# Altium PCB ESP32_USBC_V1_I1.PcbDoc (part 3 of 3)
Units mil, origin at the board's own origin, x right, y up, seen from the top; angles counter-clockwise.
Board outline 2700 x 1000 mil, 4 copper layers (L1, L2, L3, L4), stack 61.583 mil thick; 64 components, 73 nets, 299 pads, 161 vias.
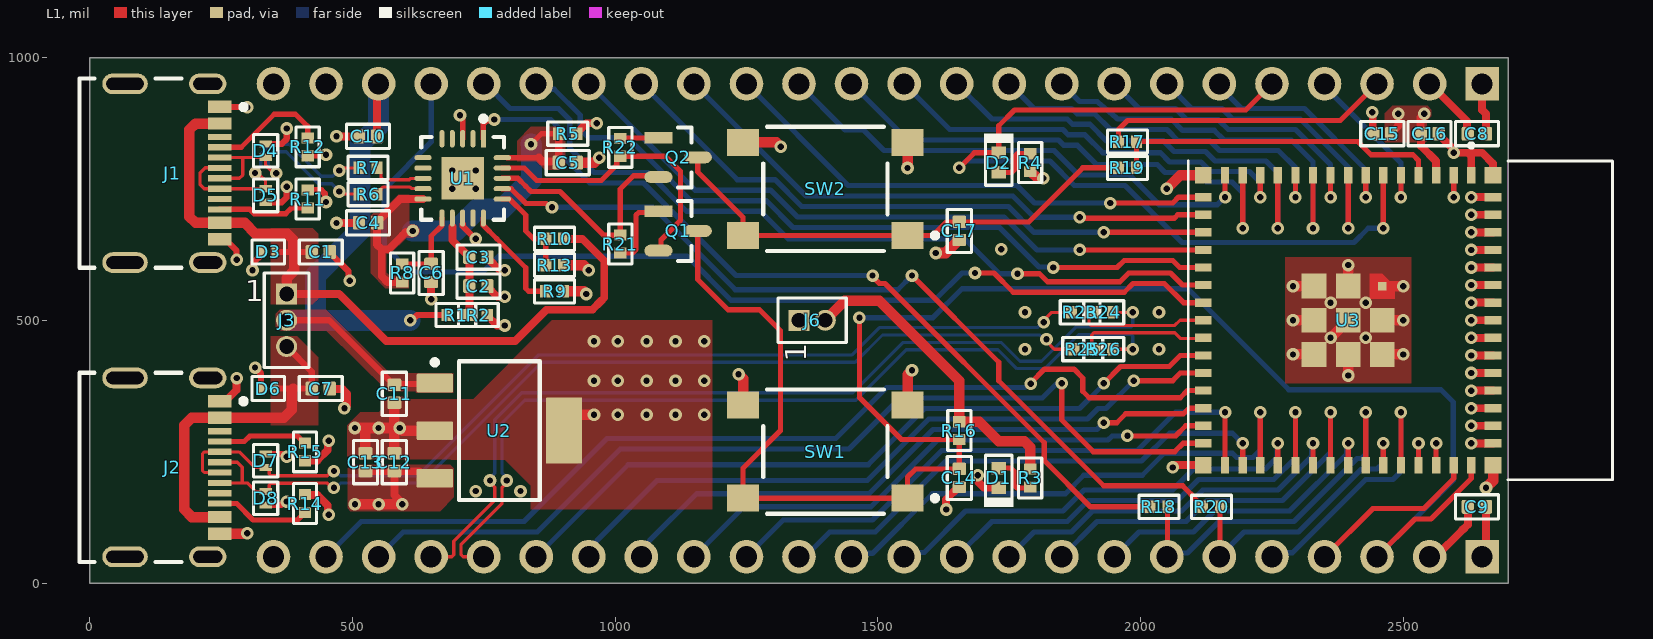
[diagram p0: L1 view]

## Via types
v1: diameter 24, hole 12, L1 to L4, tented both sides, 161 vias

## Nets (pads, with @x,y where several pads share a name; then routed paths per layer and width w, separated by ;. In a path a pad name is that pad's centre, name@x,y a point inside that pad or via, vN(x,y) a via of type N, cw(c..) or ccw(c..) an arc to the next point about the centre after c; other vN are vias at no path point) (continued)
GPIO3: (continued)
  L1 w10: v1(2428.5,734.25) U3.7
  L4 w10: 2170,925 2192,903 2312,903 2428.5,786.5 v1(2428.5,734.25)
GPIO4: J4.7 U3.8 | length 627.9
  L1 w10: v1(2395.04,675) U3.8
  L4 w10: J4.7 2097,903 2155,903 2175,883 2303.72,883 2395.04,791.68 v1(2395.04,675)
GPIO5: J4.8 U3.9 | length 578.7
  L1 w10: v1(2361.57,734.25) U3.9
  L4 w10: J4.8 1997,903 2066.59,903 2088.23,881.36 2148.36,881.36 2166.72,863 2295,863 2361.57,796.43 v1(2361.57,734.25)
GPIO6: J4.9 U3.10 | length 765.3
  L1 w10: v1(2328.11,675) U3.10
  L4 w10: J4.9 1883.86,916.14 1917.41,916.14 ccw(c1950,950) 1919.55,914.2 1953.33,885.39 1956.13,883 1959.82,883 2058.3,883 2079.94,861.36 2140.07,861.36 2158.43,843 2286.72,843 2328.11,801.61 v1(2328.11,675)
GPIO7: J4.10 U3.11 | length 708.2
  L1 w10: v1(2294.65,734.25) U3.11
  L4 w10: J4.10 1797,903 1868.72,903 1878.85,892.87 1912.6,892.87 1942.46,863 2050.02,863 2071.66,841.36 2131.79,841.36 2150.15,823 2262,823 2294.65,790.35 v1(2294.65,734.25)
GPIO8: J4.11 U3.12 | length 887.5
  L1 w10: v1(2261.18,675) U3.12
  L4 w10: J4.11 1717,883 1860.43,883 1870.57,872.87 1903.92,872.87 1935.43,841.36 2043.37,841.36 2063.37,821.36 2123.51,821.36 2141.86,803 2238.68,803 2261.18,780.49 v1(2261.18,675)
GPIO9: J4.12 U3.13 | length 824.8
  L1 w10: v1(2227.72,734.25) U3.13
  L4 w10: J4.12 1637,863 1852.15,863 1862.28,852.87 1894,852.87 1928.16,818.7 2037.75,818.7 2055.09,801.36 2115,801.36 2133.36,783 2207,783 2227.72,762.28 v1(2227.72,734.25)
GPIO10: J4.13 U3.14 | length 998.6
  L1 w10: v1(2194.25,675) U3.14
  L4 w10: J4.13 1557,843 1843.86,843 1854,832.87 1879.83,832.87 1916.27,796.43 2031.74,796.43 2046.81,781.36 2106.72,781.36 2125.07,763 2174.28,763 2194.25,743.03 v1(2194.25,675)
GPIO11: J4.14 U3.15 | length 953.3
  L1 w10: v1(2160.79,734.25) U3.15
  L4 w10: J4.14 1437.64,862.36 1472.64,862.36 1512,823 1835.58,823 1882.15,776.43 1978.57,776.43 2035,720 2146.54,720 v1(2160.79,734.25)
GPIO12: J4.15 U3.16 | length 968.1
  L1 w10: v1(1942.01,723) 2061.18,723 2072.44,734.25 U3.16
  L4 w10: J4.15 1443.57,756.43 1765,756.43 1798.43,723 v1(1942.01,723)
GPIO13: J4.16 U3.17 | length 1078
  L1 w10: v1(1884.4,696) 1886.08,694.32 2064.32,694.32 2070.79,700.79 U3.17
  L4 w10: J4.16 1363.57,736.43 1756.72,736.43 1797.14,696 v1(1884.4,696)
GPIO14: J4.17 U3.18 | length 1186.5
  L1 w10: v1(1930,667.32) 2088.44,667.32 U3.18
  L4 w10: J4.17 1232.43,767.57 1304.14,767.57 1355.29,716.43 1748.43,716.43 1797.53,667.32 v1(1930,667.32)
GPIO15: J4.18 U3.19 | length 1300.4
  L1 w10: v1(1884.4,633.86) U3.19
  L4 w10: J4.18 1152.43,747.57 1295.86,747.57 1347.01,696.43 1740.15,696.43 1802.71,633.86 v1(1884.4,633.86)
GPIO16: J4.19 U3.20 | length 1441.3
  L1 w10: v1(1834,600.39) 1955.39,600.39 1968.86,613.86 2061.14,613.86 2074.61,600.39 U3.20
  L4 w10: J4.19 860.33,939.67 884.33,939.67 933.63,890.37 933.63,863.23 949.45,847.41 1024.31,847.41 1144.14,727.57 1287.57,727.57 1338.72,676.43 1731.86,676.43 1807,601.29 1833.11,601.29 v1(1834,600.39)
GPIO17: J4.20 U3.21 | length 1573.8
  L1 w10: v1(1765.86,588.58) 1807.63,588.58 1822.82,573.39 1960.77,573.39 1977.37,590 2056.72,590 2079.79,566.93 U3.21
  L4 w10: J4.20 753.18,950 800.18,903 892.72,903 913.63,882.09 913.63,827.56 960.1,781.09 1062.35,781.09 1135.86,707.57 1276.43,707.57 1329.01,654.99 1665.01,654.99 1731.42,588.58 v1(1765.86,588.58)
GPIO18: J4.21 U3.22 | length 2030.7
  L1 w10: v1(1685,590) 1721.14,590 1757.75,553.39 1969.05,553.39 1985.66,570 2045,570 2081.54,533.46 U3.22
  L4 w10: J4.21 650,839 561,750 561,641 610,592 749,592 763,606 763,606.18 778.82,622 1136.58,622 1220.58,538 1608,538 1660,590 v1(1685,590)
GPIO21: J5.19 U3.25 | length 1429.2
  L1 w10: v1(1930,380) 1962,412 2054.52,412 2075.59,433.07 U3.25
  L4 w10: J5.19 1025,225 1481.58,225 1588.58,332 1883.86,332 1930,378.14 v1(1930,380)
GPIO26: J5.18 U3.26 | length 1323
  L1 w10: v1(1987.01,385) 2060.98,385 2075.59,399.61 U3.26
  L4 w10: J5.18 950,64.61 965.73,80.35 965.73,80.73 1080,195 1479.86,195 1596.86,312 1898.82,312 1918.82,332 1934.01,332 v1(1987.01,385)
GPIO33: J5.17 U3.28 | length 1195.4
  L1 w10: v1(1930,305) 1954.61,305 1971.7,322.09 2081.72,322.09 2092.31,332.68 U3.28
  L4 w10: J5.17 1050,64.61 1065.73,80.35 1065.73,80.73 1155,170 1483.15,170 1605.15,292 1917.14,292 1930,304.86 v1(1930,305)
GPIO34: J5.16 U3.29 | length 1072.7
  L1 w10: v1(1975,280) 2066.72,280 2085.93,299.21 U3.29
  L4 w10: J5.16 1245,145 1486.43,145 1613.43,272 1938.21,272 1946.21,280 v1(1975,280)
GPIO35: J5.15 U3.31 | length 1125.3
  L1 w10: U3.31 v1(2160.79,325)
  L4 w10: J5.15 1320,120 1489.72,120 1621.72,252 1993.59,252 2066.59,325 v1(2160.79,325)
GPIO36: J5.14 U3.32 | length 990.9
  L1 w10: U3.32 v1(2194.25,265.75)
  L4 w10: J5.14 1361.62,50 1408.62,97 1495,97 1630,232 2001.87,232 2054.87,285 2175,285 v1(2194.25,265.75)
GPIO37: J5.13 U3.33 | length 1041.3
  L1 w10: U3.33 v1(2227.72,325)
  L4 w10: J5.13 1456.47,56.47 1490,56.47 1603.53,170 1856.86,170 1891.86,205 2003.15,205 2045.15,247 2174.82,247 2183.07,238.75 2213.61,238.75 2227.72,252.86 v1(2227.72,325)
GPIO38: J5.12 U3.34 | length 856.9
  L1 w10: U3.34 v1(2261.18,265.75)
  L4 w10: J5.12 1558.23,58.23 1588.23,58.23 1667,137 1852.15,137 1892.15,177 2061,177 2101,217 2238.03,217 2259.78,238.75 2259.78,264.35 v1(2261.18,265.75)
GPIO39: J5.11 U3.35 | length 910
  L1 w10: U3.35 v1(2294.65,325)
  L4 w10: J5.11 1717,117 1860.43,117 1900.43,157 2070.15,157 2110.15,197 2253.43,197 2294.65,238.21 v1(2294.65,325)
GPIO40: J5.10 U3.36 | length 721.9
  L1 w10: U3.36 v1(2328.11,265.75)
  L4 w10: J5.10 1797,97 1868.72,97 1908.72,137 2078.43,137 2118.43,177 2261.72,177 2325.43,240.72 2325.43,263.07 v1(2328.11,265.75)
GPIO41: J5.9 U3.37 | length 770.8
  L1 w10: U3.37 v1(2361.57,325)
  L4 w10: J5.9 1917,117 2086.72,117 2126.72,157 2270,157 2361.57,248.57 v1(2361.57,325)
GPIO42: J5.8 U3.38 | length 585.9
  L1 w10: U3.38 v1(2395.04,265.75)
  L4 w10: J5.8 1997,97 2100.79,97 2140.79,137 2283.65,137 2392.36,245.71 2392.36,263.07 v1(2395.04,265.75)
GPIO45: J5.5 U3.41 | length 525.9
  L1 w10: U3.41 v1(2495.43,325)
  L4 w10: J5.5 2257.48,57.48 2288.99,57.48 2428.5,197 2480,197 2495.43,212.43 v1(2495.43,325)
GPIO46: J5.4 U3.44 | length 333.1
  L1 w10: J5.4 2442,142 2539.01,142 2595.83,198.82 U3.44
GPIO47: J5.23 U3.27 | length 1861.2
  L1 w10: v1(1791.18,379.14) 1791.18,381.18 1817,407 1873,407 1890,390 1890,365 1902.32,352.68 2075.59,352.68 2089.06,366.14 U3.27
  L4 w10: J5.23 517,117 827,117 985,275 1420,275 1517,372 1780.25,372 1787.39,379.14 v1(1791.18,379.14)
GPIO48: J5.22 U3.30 | length 1807.5
  L1 w10: v1(1850,380) 1850,310 1910,250 2065,250 2080.75,265.75 U3.30
  L4 w10: J5.22 597,97 852,97 1010,255 1445,255 1542,352 1813,352 1838.32,377.32 1847.32,377.32 v1(1850,380)
NetD1_2: D1.2 R3.1 | length 91.7
  L1 w10: D1.2 1752.92,218.7 1758.78,212.84 1758.78,186.81 1764.64,180.95 1787.96,180.95 R3.1
NetD2_2: D2.2 R4.1 | length 88.8
  L1 w10: D2.2 1754.14,781.3 1760,787.16 1760,811.15 1765.86,817.01 R4.1
NetJ1_A5: J1.A5 R12.2 | length 225
  L1 w10: J1.A5 280,829.13 288.63,829.13 351.5,892 392.14,892 415,869.14 R12.2
NetJ1_B5: J1.B5 R11.2 | length 175.3
  L1 w10: J1.B5 305.06,711.02 313.24,702.83 373.4,702.83 384.26,713.7 R11.2
NetJ2_A5: J2.A5 R15.2 | length 172.3
  L1 w10: J2.A5 294.29,269.29 305,280 395.43,280 408.82,266.61 R15.2
NetJ2_B5: J2.B5 R14.2 | length 181.8
  L1 w10: J2.B5 280,151.18 311.18,120 395.83,120 403.19,127.36 403.19,128.54 408.82,134.17 R14.2
NetQ1_1: Q1.1 R21.1 | length 143.5
  L1 w10: R21.1 1032.99,627.99 1040,635 1040,700 1045,705 1080.18,705 Q1.1
NetQ2_1: Q2.1 R22.1 | length 73.1
  L1 w10: R22.1 1010.63,846.77 1081.95,846.77 Q2.1
NetR9_2: R9.2 U1.15 | length 207.5
  L1 w10: U1.15 749.37,680.63 775,655 830,600 830,560.86 835.86,555 R9.2
RTS_FTDI: Q1.2 R22.2 U1.19 | length 554.2
  L1 w10: U1.19 827.19,789.69 830,786.87 850.87,766 973.65,766 1003.19,795.54 1003.19,806.5 1008.82,812.13 1095.64,812.13 1124.29,783.48 1124.29,689.93 1087.37,653 1087.37,637.39 Q1.2
RXD_FTDI: R18.2 U1.1 | length 1653.9
  L1 w10: U1.1 749.37,873.48 755.23,879.34 767.34,879.34 v1(770,882) ; v1(1490,585) 1490,582.86 1502.86,570 1513.64,570 1816.81,266.83 1816.81,233.19 1905,145 R18.2
  L4 w10: v1(770,882) 770.09,882.09 877.54,882.09 893.63,866 893.63,819.27 951.9,761 1054.15,761 1230.15,585 v1(1490,585)
TXD_FTDI: R20.2 U1.17 | length 1627.4
  L1 w10: U1.17 785.64,750.09 802.54,750.09 830.25,722.38 868.83,722.38 876.21,715 v1(880,715) ; v1(1565,585) 1730,420 1730,385 1930,185 2080,185 2096.18,168.82 2096.18,167.99 2117.99,146.18 R20.2
  L4 w10: v1(880,715) 1071.86,715 1228.86,558 1538,558 v1(1565,585)
U0RXD: J5.6 R20.1 U3.40 | length 560
  L1 w10: J5.6 2151,51 2151,144 R20.1 ; U3.40 v1(2461.97,265.75)
  L4 w10: J5.6 2197,97 2300.22,97 2420.22,217 2450,217 2461.97,228.97 v1(2461.97,265.75)
U0TXD: J5.7 R18.1 U3.39 | length 735.5
  L1 w10: J5.7 2051,51 2051,144 R18.1 ; U3.39 v1(2428.5,325)
  L4 w10: J5.7 2057.2,57.2 2089.27,57.2 2149.07,117 2291.94,117 2411.94,237 2420.22,237 2428.5,245.28 v1(2428.5,325)
VBUS_SENSE: R10.1 R13.2 U1.16 | length 181.5
  L1 w10: U1.16 799.37,730.63 830,700 830,670 845,655 R10.1 R13.2
pads on no net: J1.A8 J1.B8 J2.A8 J2.B8 U1.2 U1.4 U1.5 U1.6 U1.7 U1.14

## Polygon pours and split planes (outlines as drawn)
GND on L1 "GND_L01_P012" (solid, pour order 12): 1185,500 1185,150 1185,140 1175,140 870,140 840,140 840,185 790,235 495,235 490,240 490,300 515,325 550,325 555,330 555,350 560,355 600,355 605,350 730,350 880,500
GND on L1 "GND_L01_P011" (solid, pour order 11): 2275,620 2515,620 2515,380 2275,380 2275,575
+5V_VBUS2 on L1 "+5V_VBUS2_L01_P010" (solid, pour order 10): 345,300 345,470 395,470 435,430 435,300
+5V_VBUS1 on L1 "+5V_VBUS1_L01_P009" (solid, pour order 9): 345,675 345,530 425,530 435,540 435,665 425,675
+5V on L1 "+5V_L01_P008" (solid, pour order 8): 360,520 450,520 571,399 692,399 692,362 622,362 619.75,365 567.02,365 450,480 362,480 354,488 354,514
+3V3_REG on L1 "+3V3_REG_L01_P007" (solid, pour order 7): 491,144 491,218 498,225 686,225 693,218 693,163 667,137 496,137 491,142
+3V3_FTDI on L1 "+3V3_FTDI_L01_P006" (solid, pour order 6): 607,561 563,561 535,589 535,699 540,704 552,704 587,739 608,739 608,696 608,682.88 618.13,683.06 623.65,679.93 628,673.69 628,668.27 625.1,662.09 620.85,658.55 615.61,657 604,657 572,627 565,627 565,591 571,585 607,585 607,562
+3V3_FTDI on L1 "+3V3_FTDI_L01_P005" (solid, pour order 5): 813.98,841.98 813.98,802.89 849.11,802.89 866,786 904,786 905,787 905,866 903,868 840,868
+3V3 on L1 "+3V3_L01_P000" (solid, pour order 0): 2465,839 2543,839 2545,841 2545,842 2545,843 2545,845 2545,880 2553,888 2553,901 2546,908 2479,908 2465,894
GND on L2 "GND_L02_P015" (solid, pour order 15): 2690,15 2690,990 10,990 10,20 5,15
+3V3_REG on L2 "+3V3_REG_L02_P014" (solid, pour order 14): 498.36,225 485,211.64 485,130 690,130 700,140 700,225
+3V3 on L2 "+3V3_L02_P013" (solid, pour order 13): 2690,15 2690,990 910,990 910,850 1095,850 1210,735 1210,640 1220,630 1315,630 1380,565 1380,480 1390,470 1425,470 1435,480 1435,640 1485,690 1805,690 1925,810 2490,810 2515,785 2515,205 2495,185 2375,185 2310,120 2310,15
GND on L3 (split plane): 2679.9,20.1 20.1,20.1 20.1,979.9 2679.9,979.9

## Silkscreen, mask and mechanical layers (free items; w line width, h text height)
Board Shape:
  the board outline again, w20

## Text inside footprints (layer, text, board x,y; h text height)
J3: Top Overlay "1" at 296,536 h40
J4: Board Layer Stack Bottom Overlay "1" at 2626,866 h40 r270
J5: Board Layer Stack Bottom Overlay "1" at 2626,-34 h40 r270
J6: Top Overlay "1" at 1364,421 h40 r90